# Altium PCB HomeBrew-Final.PcbDoc
Units mil, origin at the board's own origin, x right, y up, seen from the top; angles counter-clockwise.
Board outline 1702.91 x 1000 mil, 2 copper layers (Top Layer, Bottom Layer); 51 components, 30 nets, 142 pads, 32 vias.
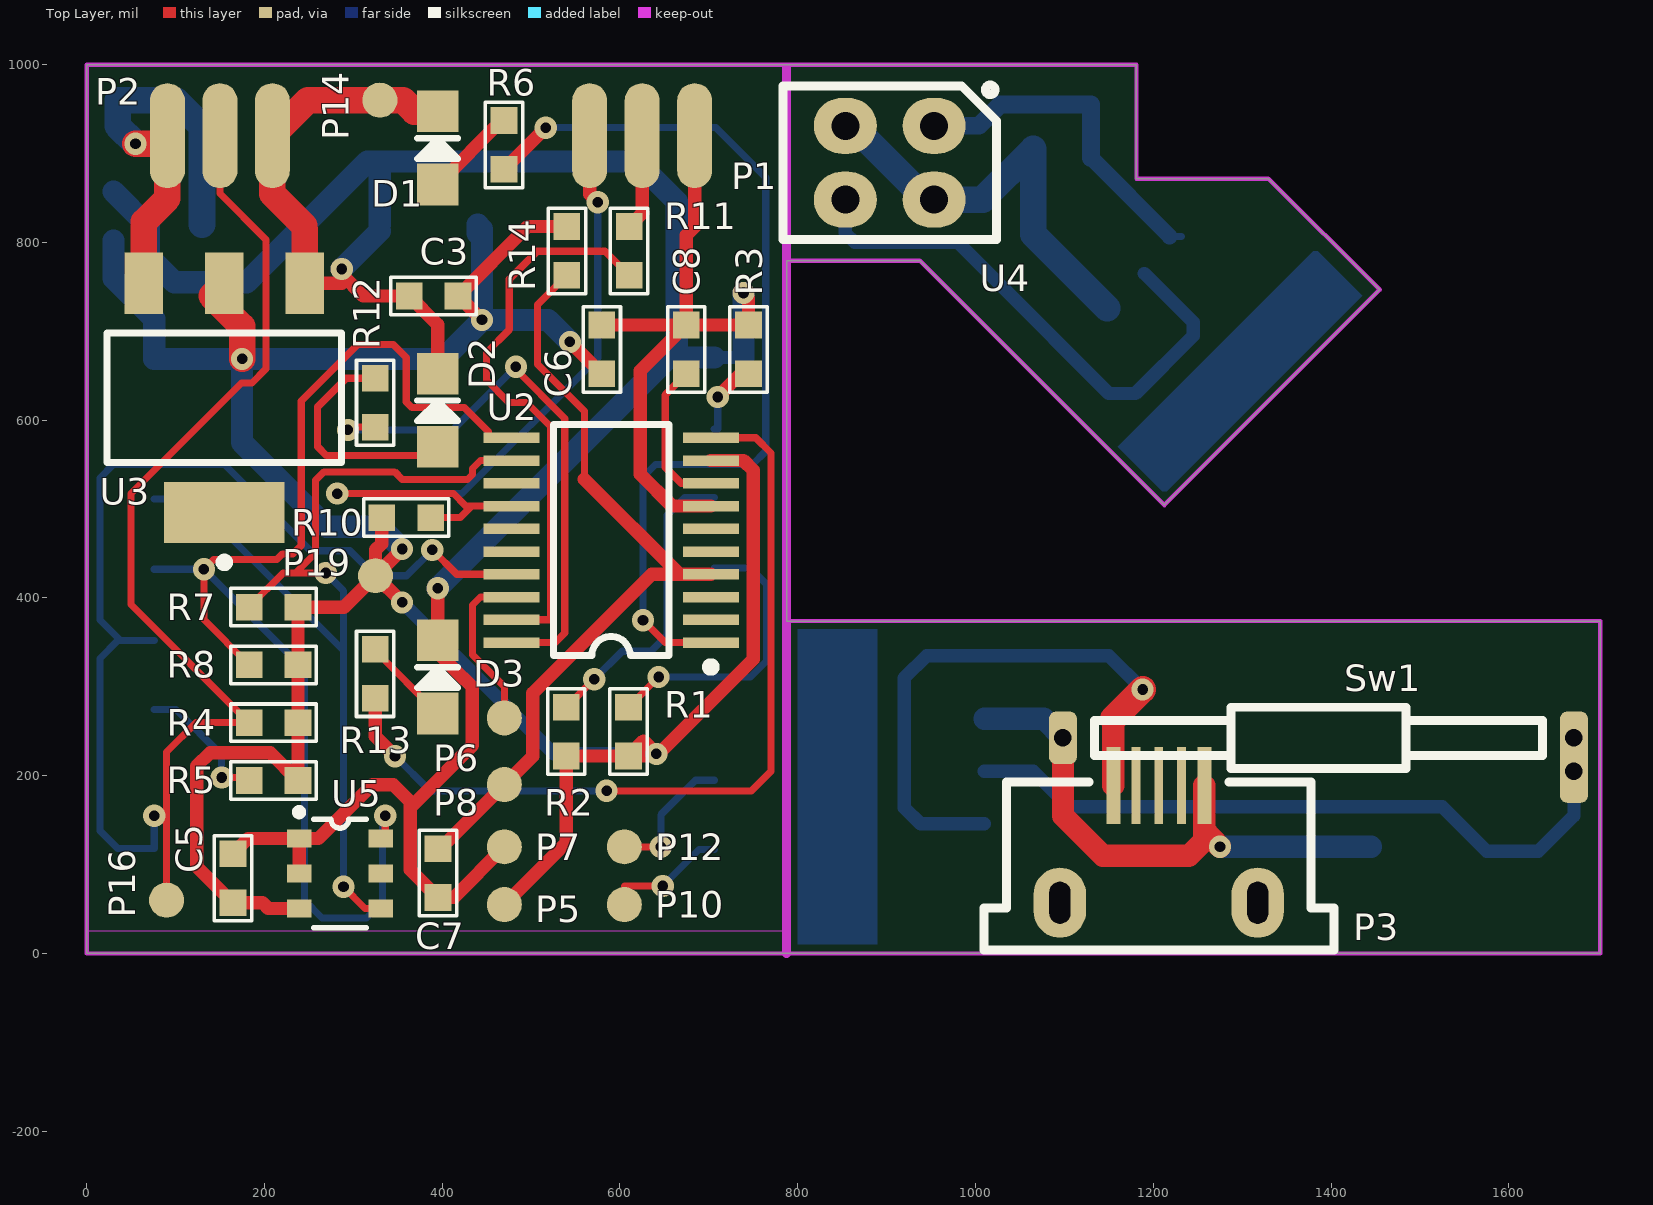
[diagram p0: Top Layer view]
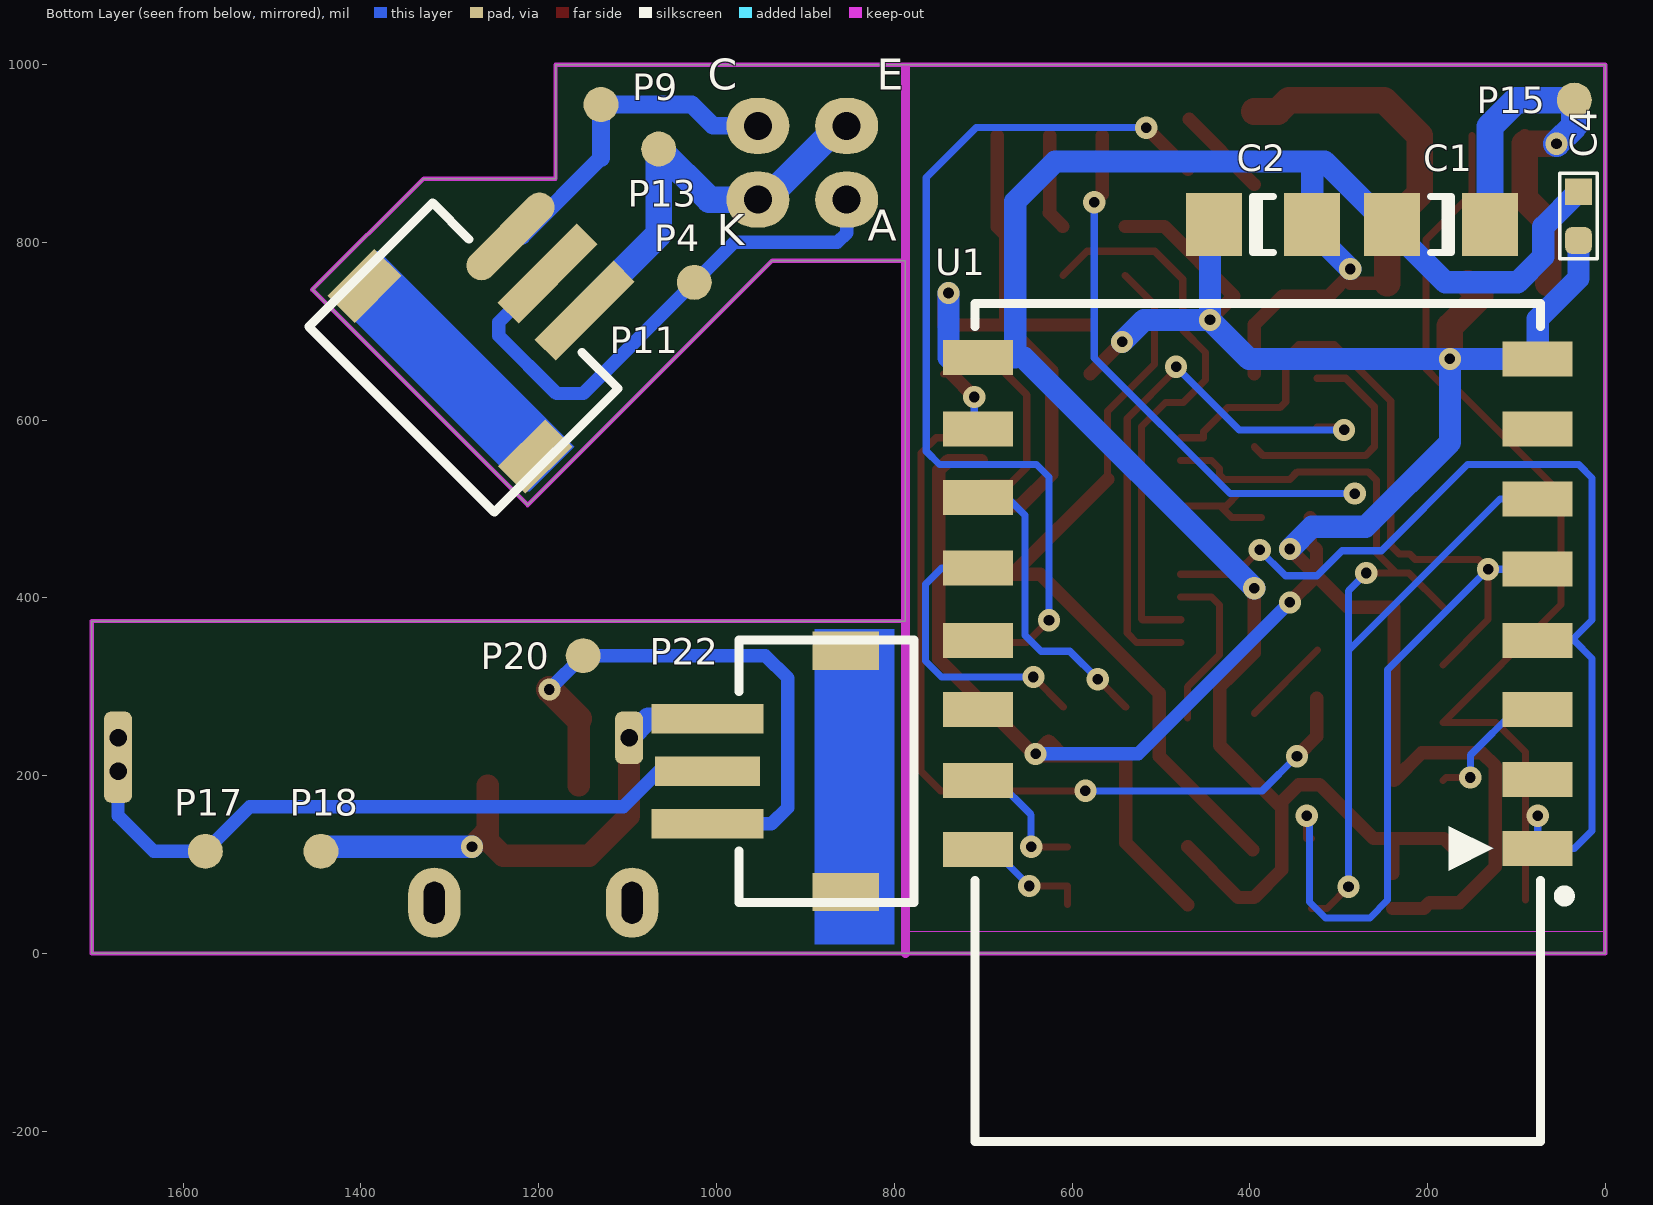
[diagram p1: Bottom Layer view, seen from below]

## Layer stack, top to bottom
Top Solder: solder mask 0.4, Solder Resist, Dk 3.5
Top Layer: signal copper 1.4
Dielectric 1: dielectric 12.6, FR-4, Dk 4.8
Bottom Layer: signal copper 1.4
Bottom Solder: solder mask 0.4, Solder Resist, Dk 3.5

## Board outline
0,0 0,1000 1181.1,1000 1181.1,871.65 1329.53,871.65 1454.72,746.85 1212.6,504.72 1212.6,504.33 937.4,779.53 787.4,779.53 787.4,374.02 1702.91,374.02 1702.91,0

## Design rules (kind name [scope] priority, off if disabled: settings)
Clearance [All] p1: gap=8 ignorepadtopadclearanceinfootprint=FALSE
PolygonConnect [All] p1: connectstyle=Relief reliefconductorwidth=10 reliefentries=4 polygonreliefangle="90 Angle" airgapwidth=10
RoutingVias [All] p1: holewidth=12 width=25 viastyle="Through Hole" minholewidth=12 minwidth=20 maxholewidth=12 maxwidth=50
SolderMaskExpansion [All] p1: expansion=4
Width Width_GND [InNetClass('GND Lines')] p1: maxlimit=300 minlimit=15 preferedwidth=15
Width Width_PWR [InNetClass('Power Lines')] p2: maxlimit=300 minlimit=10 preferedwidth=15
Width [All] p3: maxlimit=300 minlimit=6 preferedwidth=8
30 further rules are at their usual default settings.

## Classes and differential pairs
net class "GND Lines": GND GND1 GND2
net class "Power Lines": VBUS VBUS1 VCC

## Components (designator, comment, footprint, x,y, rotation, side; value= is the part's Value field where it differs from the comment)
C1 "4.7uF/16V/20%" 1206 185,820 r0 bottom
C2 "4.7uF/16V/20%" 1206 385,820 r180 bottom
C3 "100nF" 0603_R#1 390,740 r90 top
C4 "100nF" 0603_R#2 30,830 r180 bottom
C5 "100nF" 0603_R#1 165,85 r0 top
C6 "100nF" 0603_R#1 580,680 r0 top
C7 "100nF" 0603_R#1 395,90 r180 top
C8 "100nF" 0603_R#1 675,680 r0 top
D1 "LED" LED_0805 395,865 r90 top
D2 "LED" LED_0805 395,570 r90 top
D3 "LED" LED_0805 395,270 r90 top
P1 "Sensor Con" ConnPads3P-1.5mm-SMT 625,920 r90 top
P2 "USB_ReedSw" ConnPads3P-1.5mm-SMT 150,920 r90 top
P3 "Micro-USB" U-E-M5SS-W-3 1206.26,3.94 r0 top
P4 "SEND" TestPointSMD 1025,755 r180 bottom
P5 "Testpoint SMD" TestPointSMD 470,55 r0 top
P6 "Testpoint SMD" TestPointSMD 470,265 r0 top
P7 "Testpoint SMD" TestPointSMD 470,120 r0 top
P8 "Testpoint SMD" TestPointSMD 470,190 r0 top
P9 "RCV" TestPointSMD 1130,955 r180 bottom
P10 "Tx" TestPointSMD 605,55 r90 top
P11 "Sensor Con" Conn3P-1.5mm-SMT#1 1190,765 r135 bottom locked
P12 "Rx" TestPointSMD 605,120 r90 top
P13 "GND" TestPointSMD 1065,905 r90 bottom
P14 "GND" TestPointSMD 330,960 r90 top
P15 "VUSB" TestPointSMD 35,960 r90 bottom
P16 "REED" TestPointSMD 90,60 r90 top
P17 "REED" TestPointSMD 1575,115 r90 bottom
P18 "GND" TestPointSMD 1445,115 r90 bottom
P19 "VCC" TestPointSMD 325,425 r90 top
P20 "VBUS" TestPointSMD 1150,335 r90 bottom
P22 "USB_ReedSw" Conn3P-1.5mm-SMT#2 1010,205 r0 bottom locked
R1 "10K" 0603_R#1 610,250 r0 top
R2 "10K" 0603_R#1 540,250 r0 top
R3 "1K" 0603_R#1 745,680 r0 top
R4 "10K" 0603_R#1 210,260 r90 top
R5 "10K" 0603_R#1 210,195 r90 top
R6 "82R" 0603_R#1 470,910 r0 top
R7 "4K7" 0603_R#1 210,390 r90 top
R8 "4K7" 0603_R#1 210,325 r90 top
R10 "10K" 0603_R#1 360,490 r270 top
R11 "68R" 0603_R#1 610,790 r180 top
R12 "82R" 0603_R#1 325,620 r0 top
R13 "82R" 0603_R#1 325,315 r0 top
R14 "10K" 0603_R#1 540,790 r180 top
Sw1 "Reed Switch" Reed_Switch_TH 1673.23,242.52 r90 top
U1 "ESP-12" ESP_12 76.18,118.11 r0 bottom locked
U2 "STM8S003F3P6" TSSOP20 590,465 r90 top
U3 "AP2114H-3.3TRG1" SOT-223 155,625 r180 top
U4 "OptoSensor" QRD1114 903.54,889.57 r270 top locked
U5 "PCT2075GV" TSOP6 285,90 r0 top

## Footprints (in the part's own frame and the unit in brackets; to place one, negate y for a bottom-side part, rotate by r counter-clockwise, add the part's x,y. Pads: shape width x height; smd on the part's side, far side on the other; paste and mask are expansions set on the pad)
0603_R#1 [mil]
  rect 30x30 smd: 1(-0.36,-27.9) 2(-0.36,27.1)
  silkscreen extent -21,-48 21,48, body extent -15,-35 15,35, height 24
0603_R#2 [mil]
  rrect50% 30x30 smd: 1(-0.36,-27.9)
  rect 30x30 smd: 2(-0.36,27.1)
  silkscreen extent -21,-48 21,48, body extent -15,-35 15,35, height 24
1206 [mm] "Chip Capacitor; Body 3.2 x 1.6 mm (LxW typ)"
  rect 1.6x1.8 smd: 1(-1.4,0) 2(1.4,0)
  silkscreen extent -0.3,-0.8 0.3,0.8
Conn3P-1.5mm-SMT#1 [mm] "S3B-ZR-SM4A-TF"
  rect 1.9x1.1 smd: 0(-3.95,-3.45) 0(-3.95,3.45)
  oval 3.2x0.85 smd: 1(0,1.5)
  rect 3.2x0.85 smd: 2(0,0) 3(0,-1.5)
  silkscreen extent -5.9,-3.75 -0.9,3.75
Conn3P-1.5mm-SMT#2 [mm] "S3B-ZR-SM4A-TF"
  rect 1.9x1.1 smd: 0(-3.95,-3.45) 0(-3.95,3.45)
  rect 3.2x0.85 smd: 1(0,1.5) 3(0,-1.5)
  rect 3x0.85 smd: 2(0,0)
  silkscreen extent -5.9,-3.75 -0.9,3.75
ConnPads3P-1.5mm-SMT [mm]
  oval 3x1 smd: 1(0,1.5) 2(0,0) 3(0,-1.5)
ESP_12 [mm]
  rect 2x1 smd: 1(0,0) 2(0,-1.97) 3(0,-3.97) 4(0,-5.94) 5(0,-7.98) 6(0,-9.99) 7(0,-11.98) 8(0,-13.99) 9(16,-14.03) 10(16,-11.99) 11(16,-10.03) 12(16,-8.01) 13(16,-5.95) 14(16,-3.97) 15(16,-1.95) 16(16,0.03)
  silkscreen extent -0.91,-15.57 16.08,8.37
LED_0805 [mm] "LED, SMD 0805"
  rect 1.19x1.19 smd: 1(0,0) 2(2.09,0)
  silkscreen extent 0.74,-0.58 1.32,0.58
QRD1114 [mm]
  oval 1.6x1.8 hole 0.8: 1(-1.055,1.27) 2(-1.055,-1.27) 3(1.055,-1.27) 4(1.055,1.27)
  silkscreen extent -2.22,-3.05 2.2,3.05
Reed_Switch_TH [mm]
  rrect50% 1.5x0.8 hole 0.5: 1(0,0) 2(0,14.6)
  silkscreen extent -0.88,0.9 0.87,13.7
SOT-223 [mm] "SOT-223/SC-73; 4 Leads; Body 6.7 x 7.3 mm, inc. leads (LxW max)"
  rect 3.45x1.75 smd: 1(0,3.275)
  rect 1.1x1.75 smd: 2(-2.3,-3.275) 3(2.3,-3.275) 4(0,-3.275)
  silkscreen extent -3.35,-1.85 3.35,4.82
TestPointSMD [mm]
  round 1 smd: 1(0,0)
TSOP6 [mil] "2x3x0.75mm Body Dimensions"
  rect 27.52x20 smd: 1(-45.77,39.41) 2(-45.77,0) 3(-45.77,-39.41) 4(45.77,-39.41) 5(45.77,0) 6(45.77,39.41)
  silkscreen extent -49,-61 30,72
TSSOP20 [mm] "Shrink Small Outline; 20 Leads; Body Width 4.4 mm; Pitch 0.65 mm"
  rect 0.3x1.6 smd: 1(-2.925,-2.85) 2(-2.275,-2.85) 3(-1.625,-2.85) 4(-0.975,-2.85) 5(-0.325,-2.85) 6(0.325,-2.85) 7(0.975,-2.85) 8(1.625,-2.85) 9(2.275,-2.85) 10(2.925,-2.85) 11(2.925,2.85) 12(2.275,2.85) 13(1.625,2.85) 14(0.975,2.85) 15(0.325,2.85) 16(-0.325,2.85) 17(-0.975,2.85) 18(-1.625,2.85) 19(-2.275,2.85) 20(-2.925,2.85)
  silkscreen extent -3.75,-2.97 3.3,1.65
U-E-M5SS-W-3 [mm]
  oval 1.5x2 hole 0.6 slot 1.2 at 90 deg: 0(-2.825,1.35) 0(2.825,1.35)
  rect 0.4x2.2 smd: 1(-1.3,4.7) 5(1.3,4.7)
  rect 0.25x2.2 smd: 2(-0.65,4.7) 3(0,4.7) 4(0.65,4.7)
  silkscreen extent -5,0 5,4.8

## Part data
C1 C2 C3 C4 C5 C6 C7 C8: library part Cap, "Capacitor", LatestRevisionDate=17-Jul-2002, LatestRevisionNote="Re-released for DXP Platform.", Published=8-Jun-2000, Publisher="Altium Limited"
D1 D2 D3: library part LED3, "Typical BLUE SiC LED", DatasheetVersion=16-Apr-2002, LatestRevisionDate=17-Dec-2003, LatestRevisionNote="PCB Footprint replaced.", PackageDescription="SM LED; 2 C-Bend Leads; Body 3.5 x 2.8 x 1.9 mm, inc leads (LxWxH typ)", PackageReference=3.5X2.8X1.9, PackageVersion=16-Apr-2002, Published=8-Jun-2000, Publisher="Altium Limited"
P1 P2 P11 P22: library part "Header 3", "Header, 3-Pin", LatestRevisionDate=17-Jul-2002, LatestRevisionNote="Re-released for DXP Platform.", Publisher="Altium Limited"
P3: library part "Header 5", "Header, 5-Pin", LatestRevisionDate=17-Jul-2002, LatestRevisionNote="Re-released for DXP Platform.", Publisher="Altium Limited"
P4 P9 P10 P12 P13 P14 P15 P16 P17 P18 P19 P20: library part TP_1mm
P5 P6 P7 P8: library part Plug, "Plug", LatestRevisionDate=17-Jul-2002, LatestRevisionNote="Re-released for DXP Platform.", Publisher="Altium Limited"
R1 R2 R3 R4 R5 R6 R7 R8 R10 R11 R12 R13 R14: library part Res1, "Resistor", Published=8-Jun-2000, Publisher="Altium Limited", Revision="July-2002: Re-released for DXP Platform."
Sw1: library part SW-SPST, "Single-Pole, Single-Throw Switch", LatestRevisionDate=17-Jul-2002, LatestRevisionNote="Re-released for DXP Platform.", PackageDescription="Switch; 2 Leads", PackageReference=SPST-2, Published=24-Mar-1999, Publisher="Altium Limited"
U3: library part "Volt Reg", "Voltage Regulator", LatestRevisionDate=29-May-2009, LatestRevisionNote="IPC-7351 Footprint Added.", PackageDescription="3-Pin Transistor Outline Package 2.54 mm Pitch, 15.1 mm Lead Span", PackageReference=D2PAK, Published=24-Mar-1999, Publisher="Altium Limited"
U4: library part Optoisolator1, "4-Pin Phototransistor Optocoupler", DatasheetVersion=Nov-2003, LatestRevisionDate=04-Mar-2005, LatestRevisionNote="Sch pins 3 & 4 Swapped.", PackageReference=DIP-4, Published=24-Mar-1999, Publisher="Altium Limited"

## Free pads (board coordinates)
  round 19.68 on Mech15: 7(903.54,889.57)
  round 19.68 on Mech13: 8(853.54,931.1)
  rrect50% 31.5x70.87 hole 19.68: 9(1673.23,205)

## Via types
v1: diameter 25, hole 12, Top Layer to Bottom Layer, 32 vias

## Nets (pads, with @x,y where several pads share a name; then routed paths per layer and width w, separated by ;. In a path a pad name is that pad's centre, name@x,y a point inside that pad or via, vN(x,y) a via of type N, cw(c..) or ccw(c..) an arc to the next point about the centre after c; other vN are vias at no path point)
GND: C1.2 C2.2 C3.2 C4.2 C5.2 C6.2 C7.2 C8.2 D1.2 D2.2 D3.2 P1.3 P2.3 P7.1 P14.1 R3.2 U1.9 U2.7 U3.2 U5.1 U5.2 | length 3726.2
  Top Layer w15: C5.2 181.95,129.41 U5.1 ; U5.2 U5.1 ; 245,818.55 245,815 245.55,814.45 ; U3.2 287,753.94 ; v1(287,770) 287,763.94 311.3,739.64 C3.2 395,707.54 D2.2 ; 364,171 364,94.26 C7.2 412.9,62.9 P7.1 ; v1(395,411) D3.2 395,338.28 424.36,308.93 424.85,308.93 433.77,300 434,300 434,234 367.5,167.5 345,190 321.59,190 261,129.41 U5.1 ; C6.2 C8.2 ; P1.3 684.06,817.41 674.64,808 C8.2 ; U2.7 658.61,503.39 623,539 623,655.46 C8.2 ; v1(739,743) 744.64,737.36 R3.2 C8.2
  Top Layer w30: 245,818.55 209.06,854.5 P2.3 249.06,960 P14.1 356,960 368.72,947.28 D1.2 ; U3.2 245.55,814.45
  Bottom Layer w15: C2.2@329.88,812.88 C2.2 ; 654.47,670.47 664,670.47 ; U1.9 U1.9@739,670.47
  Bottom Layer w25: C4.2 70,817.46 70,785 70,783.96 98.96,755 100,755 180,755 316,891 619,891 664,846 664,670.47 U1.9 ; v1(287,770) C2.2@329.88,812.88 ; C2.2 329.88,891 ; v1(395,411) 654.47,670.47 ; U1.9@739,670.47 v1(739,743)
GND1: P11.3 P13.1 U4.2 U4.4 | length 485.7
  Bottom Layer w15: U4.2 U4.2@862,931.1 ; U4.4@945.07,848.03 U4.4 ; P11.3 P11.3@1148.24,725.76
  Bottom Layer w30: U4.2@862,931.1 U4.4@945.07,848.03 ; U4.4 1008.03,848.03 P13.1 1065,809 P11.3@1148.24,725.76
GND2: P3.5 P18.1 P22.3 Sw1.2 | length 627.2
  Top Layer w25: Sw1.2 1098.43,155 1143.43,110 1240,110 1257.44,127.44 P3.5 ; 1257.44,139 v1(1275,120)
  Bottom Layer w25: P22.3 1076.89,264.06 Sw1.2 ; v1(1275,120) P18.1@1445,120
NetC8_1: C8.1 U2.8 | length 173.6
  Top Layer w8: C8.1 651,628.46 651,547 669.02,528.98 U2.8
NetD1_1: D1.1 R6.2 | length 103.8
  Top Layer w15: D1.1 R6.2@468.37,938.37
NetD2_1: D2.1 R12.2 | length 266.2
  Top Layer w8: R12.2 292.1,647.1 260,615 260,570 270,560 385,560 D2.1
NetD3_1: D3.1 R13.2 | length 100.7
  Top Layer w8: R13.2@323.77,341.23 D3.1
NetP1_1: P1.1 R10.2 U2.14 | length 863.2
  Top Layer w8: v1(282,517.36) 412.64,517.36 426.61,503.39 433.39,503.39 ; R10.2 420.36,490.36 433.39,503.39 ; U2.14 433.39,503.39
  Top Layer w15: P1.1 565.94,854.06 v1(575,845)
  Bottom Layer w8: v1(282,517.36) 422.36,517.36 575,670 v1(575,845)
NetP1_2: P1.2 R11.1 | length 108.7
  Top Layer w8: 625,833.8 625.63,833.17
  Top Layer w15: R11.1 625.63,833.17 ; 625,833.8 P1.2
NetP4_1: P4.1 P11.2 U4.3 | length 623.5
  Bottom Layer w15: U4.3 853.54,810.46 864,800 980,800 P4.1 1150,630 1180,630 1245,695 1245,710 P11.2
NetP9_1: P9.1 P11.1 U4.1 | length 384.7
  Bottom Layer w8: P11.1@1218.24,806.76 P11.1
  Bottom Layer w18: 1130,895 P11.1@1218.24,806.76
  Bottom Layer w20: U4.1 1004,931.1 1027.9,955 P9.1 1130,895
NetP10_1: P10.1 U1.16 | length 139.1
  Top Layer w8: P10.1 605,76 v1(648.07,76)
  Bottom Layer w8: v1(648.07,76) 689,116.93 U1.16
NetP12_1: P12.1 U1.15 | length 153.2
  Top Layer w8: P12.1 v1(646,120)
  Bottom Layer w8: v1(646,120) 646,156 684.88,194.88 U1.15
NetR1_2: R1.2 U1.12 | length 329.7
  Top Layer w8: R1.2 v1(643.54,311)
  Bottom Layer w8: v1(643.54,311) 747,311 765,329 765,415.46 747,433.46 U1.12
NetR2_2: R2.2 U1.11 | length 343.3
  Top Layer w8: R2.2 v1(571,308.46)
  Bottom Layer w8: v1(571,308.46) 602.54,340 635,340 653,358 653,493 672.99,512.99 U1.11
NetR3_1: R3.1 U1.10 | length 85.2
  Top Layer w8: R3.1@736.1,652.1 R3.1
  Top Layer w15: v1(710,626) R3.1@736.1,652.1
  Bottom Layer w8: U1.10 710,590.16 v1(710,626)
NetR5_2: R5.2 U1.3 | length 154.4
  Top Layer w8: v1(152,198) 179.54,198 R5.2
  Bottom Layer w8: U1.3 100.59,274.41 152,223 v1(152,198)
NetR6_1: R6.1 U2.1 | length 1042.7
  Top Layer w8: v1(626,374.84) 651,349.84 U2.1
  Top Layer w15: R6.1 v1(516.54,929)
  Bottom Layer w8: v1(516.54,929) 708,929 764,873 764,565 749,550 640,550 626,536 v1(626,374.84)
NetR7_2: R7.2 U1.6 U2.12 U5.4 | length 1152.6
  Top Layer w8: R7.2 221.26,428 235,428 ; v1(269,428) 235,428 ; v1(289,75) 313.41,50.59 U5.4 ; U2.12 443,554.57 434,545.57 434,539 428.36,533.36 355.1,533.36 346.6,541.86 267,541.86 257.5,532.36 257.5,450.5 235,428
  Bottom Layer w8: U1.6 118.58,511.42 289,341 ; v1(269,428) 289,408 v1(289,75)
NetR8_2: R8.2 U1.5 U2.11 U5.6 | length 1458.8
  Top Layer w8: R8.2 132,375.54 v1(132,432.28) 143,443.28 213.91,443.28 220.24,449.62 232.12,449.62 241.5,459 241.5,621.5 305,685 345,685 359.57,670.43 359.57,620.43 366,614 425,614 452,587 452,580.16 U2.11 ; U5.6 336,129.41 v1(336,155)
  Bottom Layer w8: U1.5 v1(132,432.28) 245,319.28 245,60 265,40 315,40 333,58 333,152 v1(336,155)
NetR11_2: R11.2 U2.19 | length 637.9
  Top Layer w8: U2.19 521,375.43 522,376.43 522,593 495,620 475,620 450,645 450,676.25 475.5,701.75 475.5,758.5 507,790 583.26,790 R11.2
NetR12_1: R12.1 U2.20 | length 637.3
  Top Layer w8: v1(294,589) 297.1,592.1 R12.1 ; U2.20 527.41,349.84 538,360.43 538,602 483,657 v1(483,660)
  Bottom Layer w8: v1(294,589) 412,589 v1(483,660)
NetR13_1: R13.1 U2.10 | length 955.5
  Top Layer w8: v1(585,183) 748,183 770,205 770,563 752.84,580.16 U2.10
  Top Layer w15: R13.1 324.64,244.36 v1(347,222)
  Bottom Layer w8: v1(347,222) 386,183 v1(585,183)
ReedSw: P2.2 P16.1 R4.2 U1.1 U1.4 U2.17 | length 2241.7
  Top Layer w8: v1(76.18,155) 82,155 90,147 ; P16.1 90,147 ; P2.2 150,855 202,803 202,657.71 186.18,641.9 174.36,641.9 50,517.54 50,392.54 R4.2 123,259.64 90,226.64 90,147 ; v1(389,454) 416.39,426.61 U2.17
  Bottom Layer w8: v1(76.18,155) U1.1 35,118.11 15,138.11 15,331.97 35,351.97 U1.4 38.03,351.97 15,375 15,535 30,550 155,550 251.98,453.02 296.31,453.02 324.33,425 360,425 v1(389,454)
ReedSw1: P17.1 P22.2 pad.9 Sw1.1 | length 804.6
  Top Layer w8: pad.9 Sw1.1
  Bottom Layer w15: P22.2 1065,205 1105,165 1525,165 P17.1 1633.23,115 1673.23,155 pad.9
Reset: C7.1 P8.1 R14.2 U2.4 | length 891.5
  Top Layer w8: R14.2 507.5,730.04 507.5,662.5 560,610 560,533.61
  Top Layer w15: C7.1@396.63,116.63 P8.1 502,222 502,292.95 635.67,426.61 667,426.61 ; 560,533.61 667,426.61 ; U2.4 667,426.61
SWIM: P6.1 U2.18 | length 189.5
  Top Layer w8: P6.1 470,300 434,336 434,392.02 443,401.02 U2.18
VBUS: C1.1 P2.1 P15.1 U3.3 | length 487.6
  Top Layer w15: P2.1@90.94,911 P2.1
  Top Layer w30: v1(55,911) 90.94,911 90.94,849.49 64.45,823 U3.3
  Bottom Layer w30: v1(55,911) 35,931 P15.1 100,960 129.88,930.12 C1.1
VBUS1: P3.1 P20.1 P22.1 | length 659.2
  Top Layer w25: P3.1 1155.08,264.08
  Top Layer w30: 1155.08,264.08 v1(1188,297)
  Bottom Layer w15: P22.1 938.11,145.94 920,164.06 920,310 945,335 P20.1 v1(1188,297)
VCC: C2.1 C3.1 C4.1 C5.1 C6.1 P5.1 P19.1 R1.1 R2.1 R4.1 R5.1 R7.1 R8.1 R10.1 R14.1 U1.8 U2.9 U3.4 U5.3 | length 3382.2
  Top Layer w15: U5.3 204.51,50.59 198,57.1 C5.1 124,97.74 124,211 139,226 206.54,226 R5.1 R4.1 R8.1 R7.1 289.64,389.64 P19.1 ; R10.1 332.1,461.1 325,454 P19.1 ; v1(355,395) P19.1 ; v1(355,455) P19.1 ; v1(444.77,712.77) C3.1 496.15,817.9 R14.1 ; P5.1 539.64,124.64 R2.1 R1.1 ; v1(543.74,688) C6.1 ; v1(641,224.54) 626.54,239 R1.1 ; U2.9 739,554.57 750,543.57 750,331 641.1,222.1 R1.1
  Top Layer w30: U3.4 140.81,739.75 175,705.56 v1(175,668.9)
  Bottom Layer w15: v1(355,395) 525.46,224.54 v1(641,224.54)
  Bottom Layer w25: 30.36,774.03 30.36,759.64 76.18,713.82 U1.8 400.9,668.9 v1(444.77,712.77) ; 30.36,779.07 C4.1 ; v1(175,668.9) 175,575 270,480 330,480 v1(355,455) ; C2.1 440.12,810.12 444.77,814.77 v1(444.77,712.77) ; v1(543.74,688) 518.97,712.77 v1(444.77,712.77)
pads on no net: P3.0 P3.2 P3.3 P3.4 P11.0 P22.0 U1.2 U1.7 U1.13 U1.14 U2.2 U2.3 U2.5 U2.6 U2.13 U2.15 U2.16 U3.1 U5.5

## Keep-outs
Top Layer:
  rectangle: 0,0 790,25
Bottom Layer:
  rectangle: 0,0 790,25
Keep-Out Layer:
  lines w5: 787.4,374.02 1702.91,374.02 1702.91,0 787.4,0 0,0 0,1000 1181.1,1000 1181.1,871.65 1329.53,871.65 1454.72,746.85 1212.6,504.72 ; 787.4,779.53 937.4,779.53 1212.6,504.33
  lines w10: 787.4,0 787.4,374.02 787.4,779.53 787.4,997.6

## Other copper
Bottom Layer:
  rectangle: 800,10 890,365
  region: 1435,740 1215,520 1210,520 1160,570 1380,790 1385,790

## Silkscreen, mask and mechanical layers (free items; w line width, h text height)
Bottom Overlay:
  text "E" at 820,960 h60
  text "C" at 1010,960 h60
  text "A" at 830,790 h60
  text "K" at 1000,785 h60
Mechanical 1:
  lines w5: 1212.6,504.33 1212.6,504.72
Mechanical 15:
  lines w10: 354.33,312.99 433.07,312.99 ; 354.33,608.27 433.07,608.27 ; 354.33,903.54 433.07,903.54 ; 393.7,0 393.7,1045 ; 709.41,1078.82 770,1015.47 ; 787.4,0 787.4,43.82 ; 787.4,68.82 787.4,128.82 ; 787.4,153.82 787.4,203.82 ; 787.4,248.82 787.4,318.82 ; 787.4,468.82 787.4,630 ; 787.4,683.82 787.4,733.82 ; 787.4,848.82 787.4,888.82 ; 787.4,933.82 787.4,973.82 ; 1612.13,216.54 1673.23,216.54 ; 1673.23,130 1673.23,216.54 ; 1673.23,270 1673.23,216.54 ; 1762.13,216.54 1673.23,216.54
  text "V-Cut This vertical line" at -70.59,1103.82 h60

## Text inside footprints (layer, text, board x,y; h text height)
U1: Mechanical 13 "ANTENNA AREA" at 81.18,-191.89 h10 r180; Mechanical 13 "CUTOUT POLYGON" at 81.18,-171.89 h10 r180